# Altium PCB AutoCamera.PcbDoc
Units mm, origin at the board's own origin, x right, y up, seen from the top; angles counter-clockwise.
Board outline 100 x 100 mm, 2 copper layers (Top, Bottom), stack 1.67 mm thick; 14 components, 1 nets, 147 pads, 0 vias.
Unrouted connection lines stored in the file: 1.
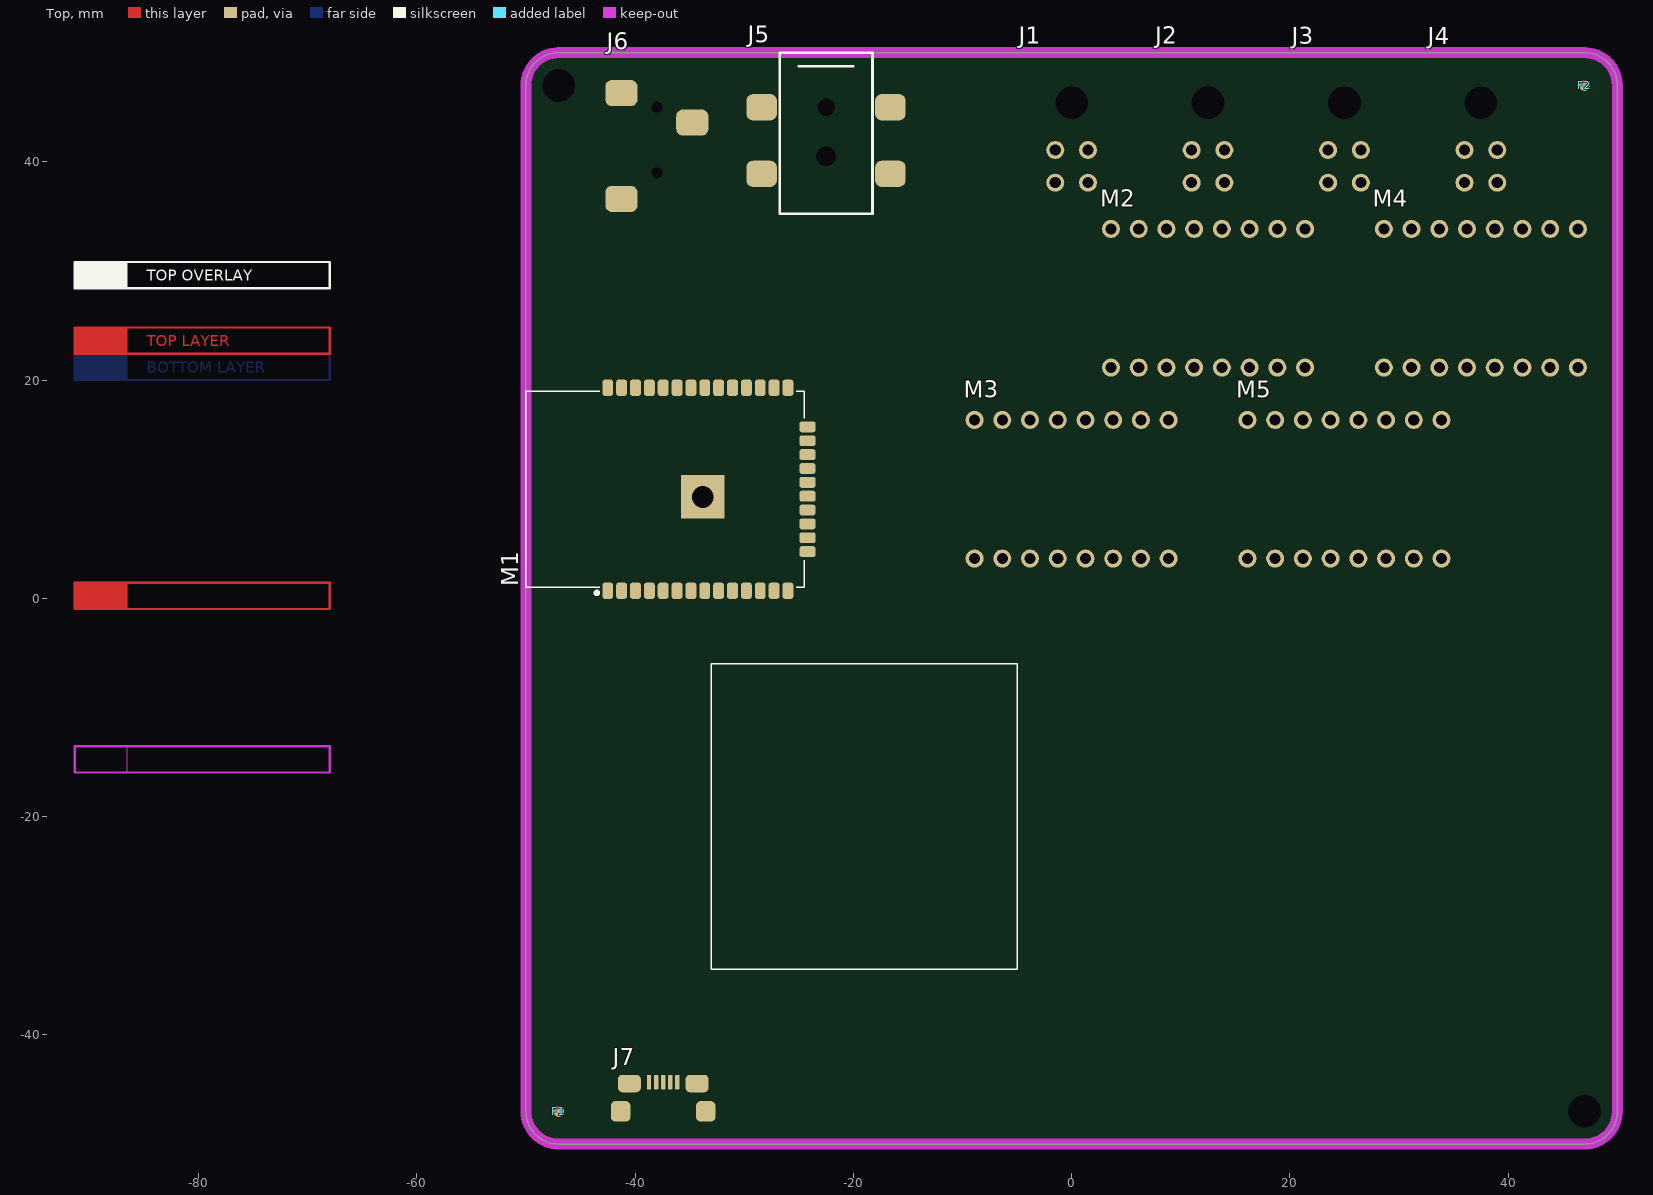
[diagram p0: Top view]
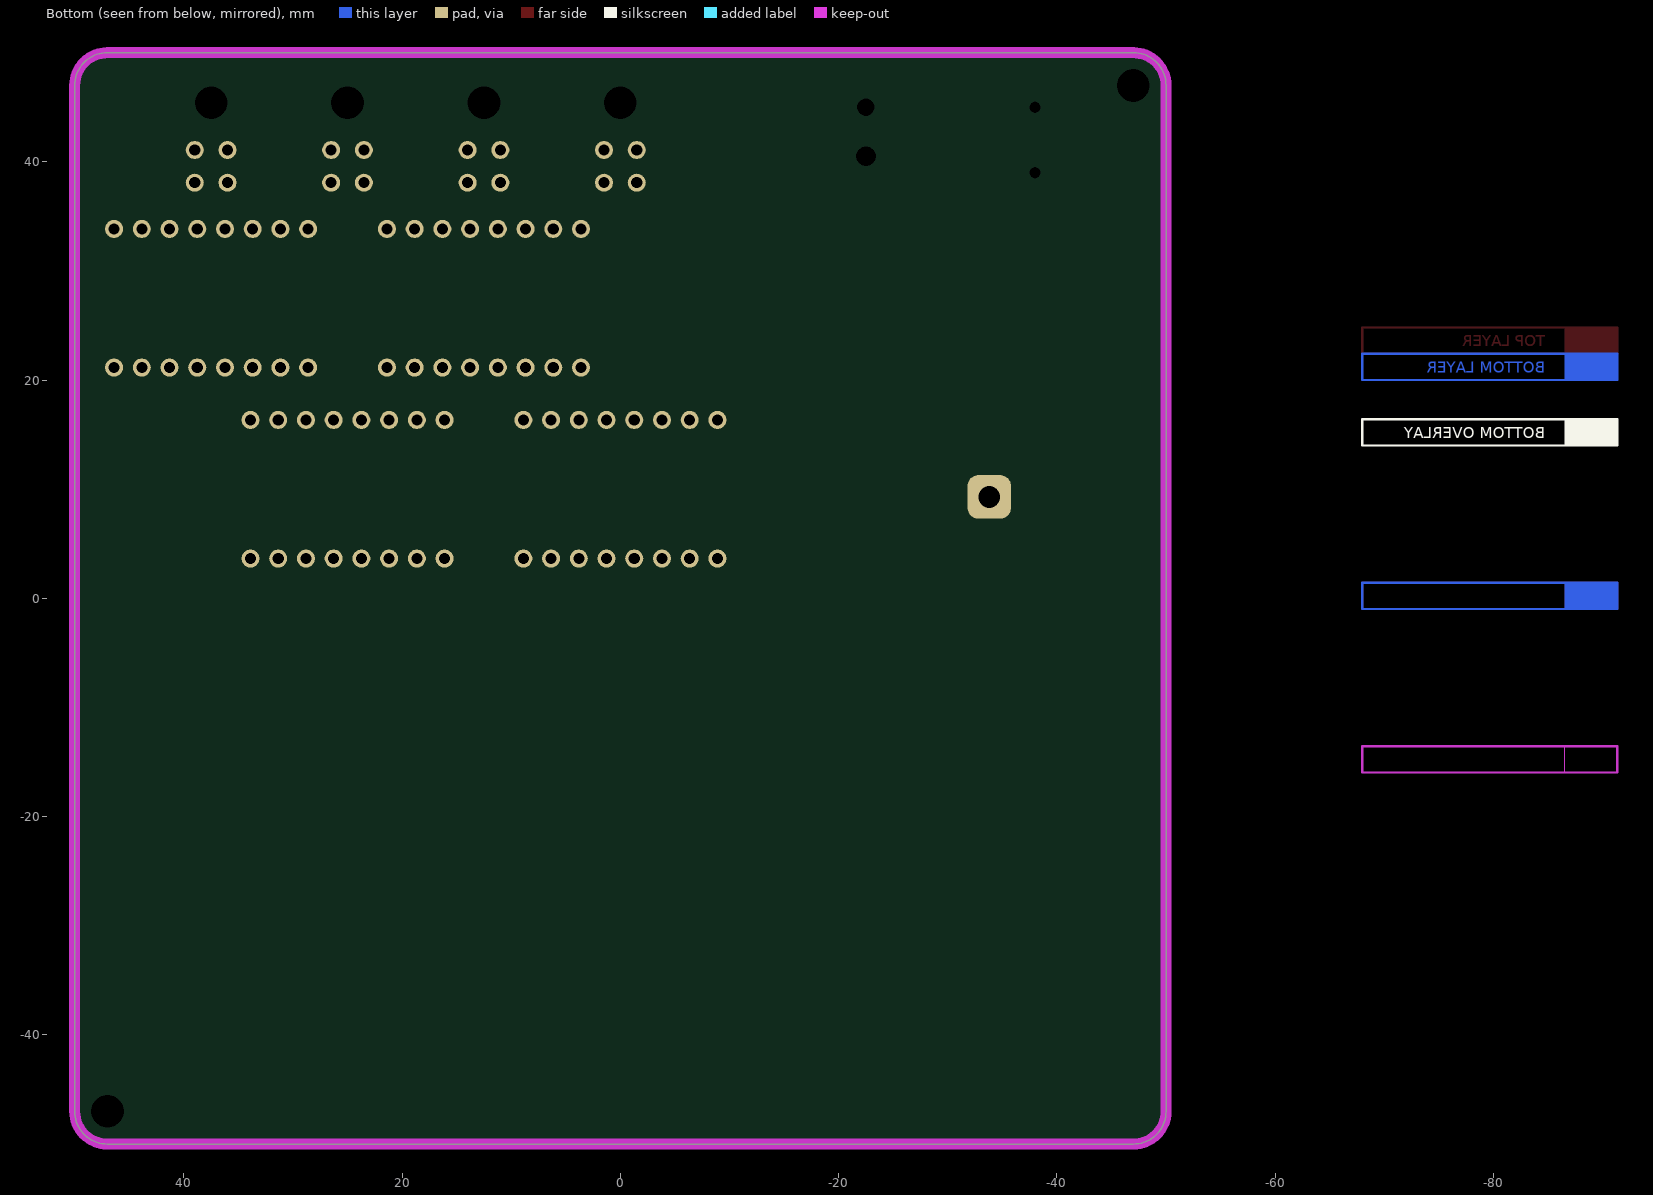
[diagram p1: Bottom view, seen from below]
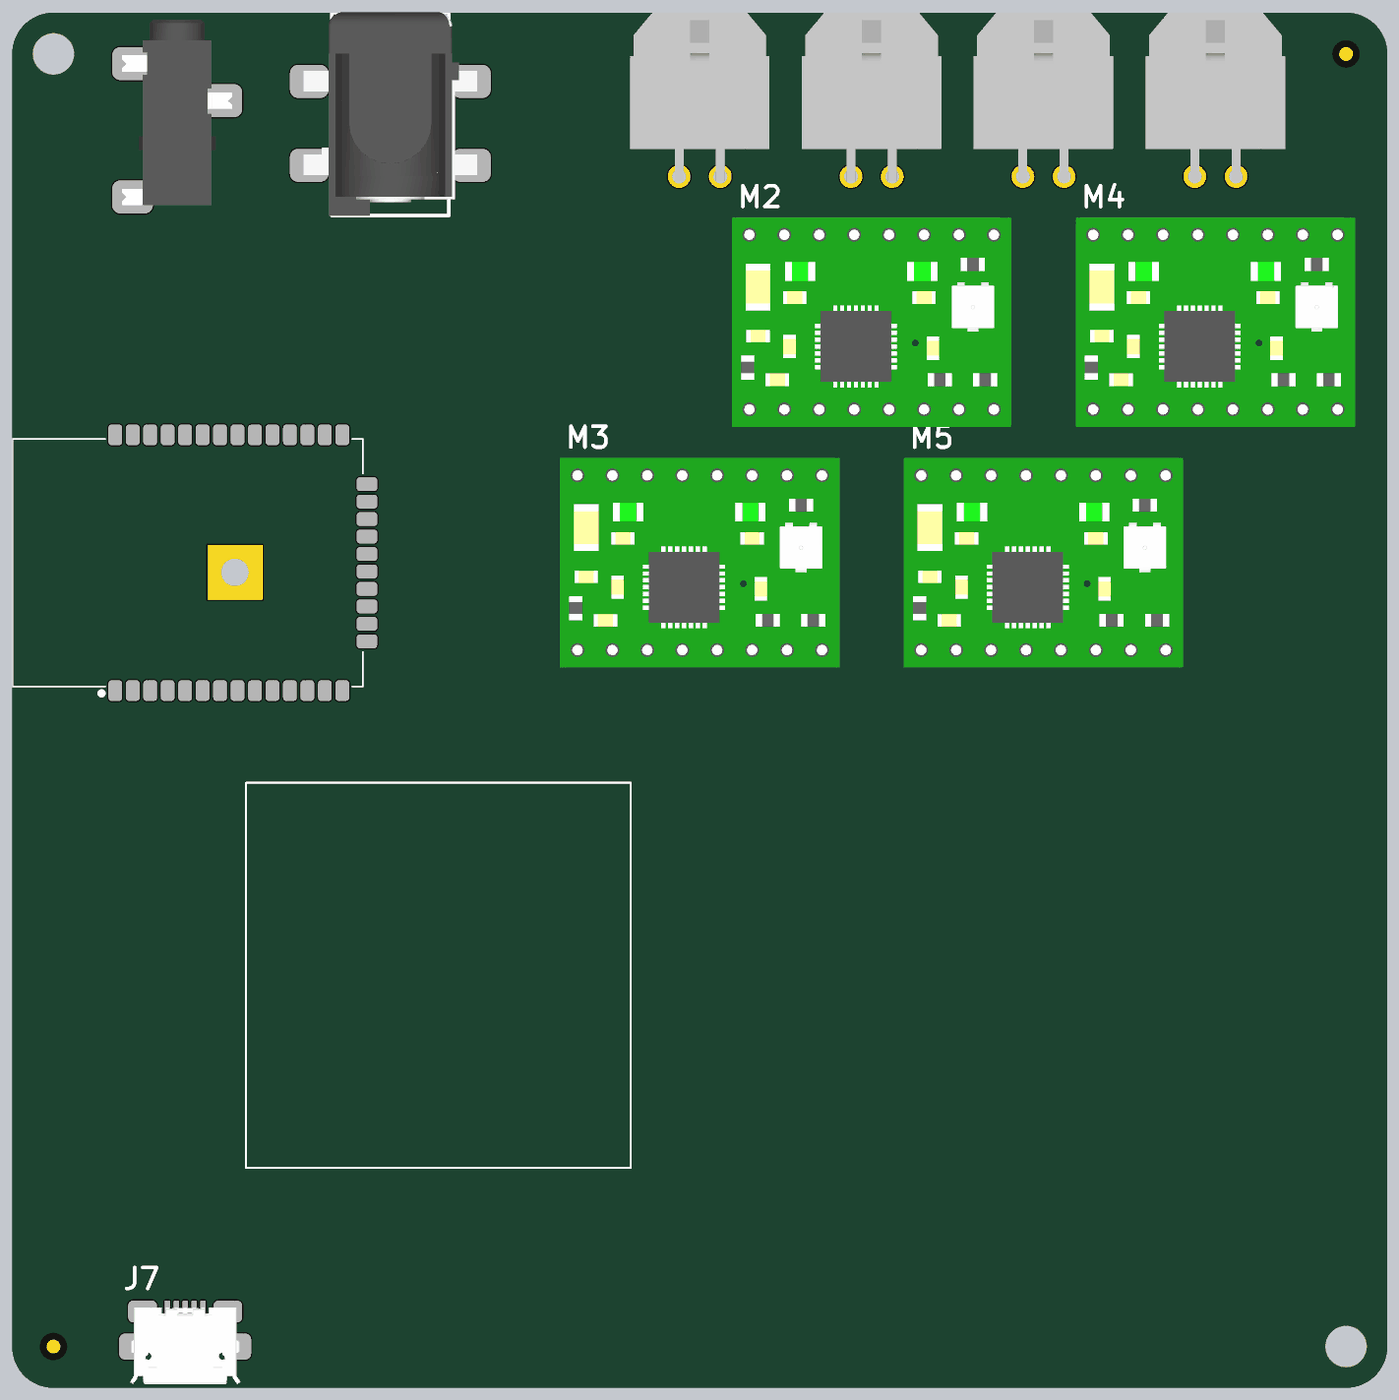
[diagram p2: 3D render of the assembled board from above, using the file's embedded part models]

## Layer stack, top to bottom
Top Solder: solder mask 0.0102, Solder Resist, Dk 3.5
Top: signal copper 0.035
Dielectric1: core 1.6, FR-4, Dk 4.58
Bottom: signal copper 0.035
Bottom Solder: solder mask 0.0102, Solder Resist, Dk 3.5

## Board outline
-50,-47 -50,47 cw(c-47,47) -47,50 47,50 cw(c47,47) 50,47 50,-47 cw(c47,-47) 47,-50 -47,-50 cw(c-47,-47)

## Design rules (kind name [scope] priority, off if disabled: settings)
AssemblyTestPointUsage [All] p1 off:
AssemblyTestpoint [All] p1 off: testpointundercomponent=TRUE minsize=1.016 maxsize=2.54 preferedsize=1.524 minholesize=0 maxholesize=1.016 preferedholesize=0.813 testpointgrid=0.025 usegrid=TRUE gridtolerance=0 allowsidetop=TRUE allowsidebottom=TRUE
Clearance ClearanceViaPad [IsVia vs IsPad] p1: gap=0.1
Clearance ClearanceGNDpolygons [InPolygonClass('GNDpolygons')] p2: gap=0.3
Clearance ClearanceTechnology [All] p3: gap=0.2
FabricationTestPointUsage [All] p1 off: valid=0 allowmultiple=FALSE
FabricationTestpoint [All] p1 off: side=3 testpointundercomponent=TRUE minsize=1.016 maxsize=2.54 preferedsize=1.524 minholesize=0 maxholesize=1.016 preferedholesize=0.813 testpointgrid=0.025 allowsidetop=TRUE allowsidebottom=TRUE usegrid=TRUE gridtolerance=0
HoleSize [All] p1: absolutevalues=TRUE maxlimit=6.3 minlimit=0.3 maxpercent=80.000 minpercent=20.000
HoleToHoleClearance [All] p1: gap=0.3 allowstackedmicrovias=TRUE
MinimumAnnularRing [All] p1: minimumring=0.2
MinimumSolderMaskSliver [All] p1: minsoldermaskwidth=0.1
PlaneClearance [All] p1: clearance=0.25
PolygonConnect PolygonConnectVia [IsVia] p1: connectstyle=Direct reliefconductorwidth=0.4 reliefentries=4 polygonreliefangle="90 Angle" airgapwidth=0.254
PolygonConnect PolygonConnectBigPads [(ObjectKind = 'Pad') And ((AsMM(PadXSize_AllLayers) > 2) Or (AsMM(PadYSize_AllLayers) > 2))] p2: connectstyle=Direct reliefconductorwidth=0.4 reliefentries=4 polygonreliefangle="90 Angle" airgapwidth=0.254
PolygonConnect PolygonConnectGeneral [All] p3: connectstyle=Relief reliefconductorwidth=0.3 reliefentries=4 polygonreliefangle="90 Angle" airgapwidth=0.2
RoutingVias [All] p1: holewidth=0.6 width=1.2 viastyle="Through Hole" minholewidth=0.3 minwidth=0.7 maxholewidth=0.9 maxwidth=1.4
SilkToSilkClearance [All] p1: silktosilkclearance=0.15
SilkToSolderMaskClearance SilkscreenOverComponentPads [IsPad] p1: minsilkscreentomaskgap=0.1 clearancetoexposedcopper=FALSE
SolderMaskExpansion [All] p1: expansion=0.1
Width WidthTechnology [All] p1: maxlimit=3 minlimit=0.16 preferedwidth=0.6
20 further rules are at their usual default settings.

## Classes and differential pairs
component class AutoCamera: J1 J2 J3 J4 J5 J7 M1 M2 M3 M4 M5

## Components (designator, comment, footprint, x,y, rotation, side; value= is the part's Value field where it differs from the comment)
F1 "Fiducial" FIDUCIAL -47,-47 r90 top locked
F2 "Fiducial" FIDUCIAL 47,47 r90 top locked
J1 "43045-0400" MOLEX_43045-0400 0,50 r180 top
J2 "43045-0400" MOLEX_43045-0400 12.5,50 r180 top
J3 "43045-0400" MOLEX_43045-0400 25,50 r180 top
J4 "43045-0400" MOLEX_43045-0400 37.5,50 r180 top
J5 "Barrel Jack, Right Angle" "Barrel Jack, S/M, R/A" -22.5,50 r270 top
J6 "2.5mm Audio Jack" "2.5MM AUDIO" -38,48 r270 top
J7 "USB-MICRO" 10118192 -37.42,-47 r0 top
M1 "ESP-WROOM-32" ESP-WROOM-32 -42.5,10 r90 top
M2 "A4988" A4988 12.5,27.5 r90 top
M3 "A4988" A4988 0,10 r90 top
M4 "A4988" A4988 37.5,27.5 r90 top
M5 "A4988" A4988 25,10 r90 top

## Footprints (in the part's own frame and the unit in brackets; to place one, negate y for a bottom-side part, rotate by r counter-clockwise, add the part's x,y. Pads: shape width x height; smd on the part's side, far side on the other; paste and mask are expansions set on the pad)
"2.5MM AUDIO" [mm]
  rrect50% 2.4x2.95 smd: 1(1.7,-3.25) 2(11.4,-3.25) 3(4.4,3.25)
  round 0 hole 1.016 unplated: 5(3,0)
  round 0 hole 1.016: 6(9,0)
  body extent -1.5,-4 12,4, height 4.6
10118192 [mm] "CONN USB MICRO B RECPT SMT R/A"
  rrect50% 0.4x1.35 smd: 1(-1.3,2.675) 2(-0.65,2.675) 3(0,2.675) 4(0.65,2.675) 5(1.3,2.675)
  rrect50% 1.8x1.9 smd: S1(-3.9,0) S2(3.9,0)
  rrect50% 2.1x1.6 smd: S3(-3.1,2.55) S4(3.1,2.55)
  body extent -4.04,-2.75 4.04,2.85, height 2.78
A4988 [mil] "Stepper Driver"
  round 65 hole 40: 0(-250,350) 1(-250,250) 2(-250,150) 3(-250,50) 4(-250,-50) 5(-250,-150) 6(-250,-250) 7(-250,-350) 8(250,-350) 9(250,-250) 10(250,-150) 11(250,-50) 12(250,50) 13(250,150) 14(250,250) 15(250,350)
  body extent -300,-400 300,400, height 568
"Barrel Jack, S/M, R/A" [mm] "Barrel Jack, 2.5mm ID, 5.5mm OD, Right Angle, Surface Mount"
  rrect50% 2.4x2.8 smd: 1(5,5.9) 1(11.1,5.9) 2(5,-5.9) 3(11.1,-5.9)
  round 0 hole 1.6 unplated: ""(5,0)
  round 0 hole 1.8 unplated: ""(9.5,0)
  silkscreen extent 0,-4.25 14.75,4.25, body extent -0.03,-6.3 14.77,6.3, height 11.1
ESP-WROOM-32 [mm]
  rrect50% 1.5x1 smd: 1(-9.3,0) 2(-9.3,-1.27) 3(-9.3,-2.54) 4(-9.3,-3.81) 5(-9.3,-5.08) 6(-9.3,-6.35) 7(-9.3,-7.62) 8(-9.3,-8.89) 9(-9.3,-10.16) 10(-9.3,-11.43) 11(-9.3,-12.7) 12(-9.3,-13.97) 13(-9.3,-15.24) 14(-9.3,-16.51) 25(9.3,-16.51) 26(9.3,-15.24) 27(9.3,-13.97) 28(9.3,-12.7) 29(9.3,-11.43) 30(9.3,-10.16) 31(9.3,-8.89) 32(9.3,-7.62) 33(9.3,-6.35) 34(9.3,-5.08) 35(9.3,-3.81) 36(9.3,-2.54) 37(9.3,-1.27) 38(9.3,0)
  rrect50% 1x1.5 smd: 15(-5.715,-18.3) 16(-4.445,-18.3) 17(-3.175,-18.3) 18(-1.905,-18.3) 19(-0.635,-18.3) 20(0.635,-18.3) 21(1.905,-18.3) 22(3.175,-18.3) 23(4.445,-18.3) 24(5.715,-18.3)
  rect 4x4 / inner rrect50% 4x4 / far side rrect50% 4x4 hole 2: 39(-0.7,-8.7)
  silkscreen extent -9.55,-18 9,7.5
FIDUCIAL [mm] "Fiducial"
  round 1 smd paste-1 mask+0.5: ""(0,0)
  body extent -0.49,-0.5 0.5,0.5, height 0.5
MOLEX_43045-0400 [mil] "4 Positions Header Connector 0.118\" (3.00mm) Through Hole, Right Angle Tin"
  round 65 hole 40: 1(59,351) 2(-59,351) 3(59,469) 4(-59,469)
  round 0 hole 118: 5(0,181)
  body extent -200,0 200,482, height 345

## Part data
J1 J2 J3 J4: library part "MOLEX 43045-0400", "Molex Micro-fit, 4-Position, Right Angle, Through Hole"
J5: "Barrel Jack, 2.5mm ID, 5.5mm OD, Right Angle, Surface Mount"

## Free pads (board coordinates)
  round 1 hole 3: 0(-47,47) 0(47,-47)

## Nets (pads, with @x,y where several pads share a name; then routed paths per layer and width w, separated by ;. In a path a pad name is that pad's centre, name@x,y a point inside that pad or via, vN(x,y) a via of type N, cw(c..) or ccw(c..) an arc to the next point about the centre after c; other vN are vias at no path point)
GND: M1.38 M1.39
pads on no net: F1. F2. J1.1 J1.2 J1.3 J1.4 J1.5 J2.1 J2.2 J2.3 J2.4 J2.5 J3.1 J3.2 J3.3 J3.4 J3.5 J4.1 J4.2 J4.3 J4.4 J4.5 J5. J5.1 J5.2 J5.3 J6.1 J6.2 J6.3 J6.5 J6.6 J7.1 J7.2 J7.3 J7.4 J7.5 J7.S1 J7.S2 J7.S3 J7.S4 M1.1 M1.2 M1.3 M1.4 M1.5 M1.6 M1.7 M1.8 M1.9 M1.10 M1.11 M1.12 M1.13 M1.14 M1.15 M1.16 M1.17 M1.18 M1.19 M1.20 M1.21 M1.22 M1.23 M1.24 M1.25 M1.26 M1.27 M1.28 M1.29 M1.30 M1.31 M1.32 M1.33 M1.34 M1.35 M1.36 M1.37 M2.0 M2.1 M2.2 M2.3 M2.4 M2.5 M2.6 M2.7 M2.8 M2.9 M2.10 M2.11 M2.12 M2.13 M2.14 M2.15 M3.0 M3.1 M3.2 M3.3 M3.4 M3.5 M3.6 M3.7 M3.8 M3.9 M3.10 M3.11 M3.12 M3.13 M3.14 M3.15 M4.0 M4.1 M4.2 M4.3 M4.4 M4.5 M4.6 M4.7 M4.8 M4.9 M4.10 M4.11 M4.12 M4.13 M4.14 M4.15 M5.0 M5.1 M5.2 M5.3 M5.4 M5.5 M5.6 M5.7 M5.8 M5.9 M5.10 M5.11 M5.12 M5.13 M5.14 M5.15
copper on no net: | length 103.1
  Top w0.2: -91.342,22.414 -91.342,24.827 -67.974,24.827 -67.974,22.414 -91.342,22.414
  Bottom w0.2: -91.342,20.001 -91.342,22.414 -67.974,22.414 -67.974,20.001 -91.342,20.001

## Polygon pours and split planes (outlines as drawn)
GND on Bottom "Top-No Net" (solid, remove dead copper, shelved, pour order 0): -50,-47 -50,47 cw(c-47,47) -47,50 47,50 cw(c47,47) 50,47 50,-47 cw(c47,-47) 47,-50 -47,-50 cw(c-47,-47)

## Keep-outs
Keep-Out Layer:
  rectangle: -91.342,-15.965 -86.516,-13.552
  lines w0.2: -91.342,-15.965 -91.342,-13.552 -67.974,-13.552 -67.974,-15.965 -91.342,-15.965
  lines w1: -47,50 ccw(c-47,47) -50,47 -50,-47 ccw(c-47,-47) -47,-50 47,-50 ccw(c47,-47) 50,-47 ; -47,50 -47,50 ; -47,50 47,50 ; 47,50 cw(c47,47) 50,47 ; 47,50 47,50 ; 50,-47 50,47 ; 50,-47 50,-47 ; 50,47 50,47
  text "ROUTING KEEPOUT LAYER" at -84.738,-15.279 h0.89

## Other copper
Top:
  rectangle: -91.342,22.414 -86.516,24.827
  text "TOP LAYER" at -84.738,23.1 h1.02
Bottom:
  rectangle: -91.342,20.001 -86.516,22.414
  text "BOTTOM LAYER" at -84.738,20.687 h1.02
Multi-Layer:
  rectangle: -91.342,-0.979 -86.516,1.434
  lines w0.2: -91.342,-0.979 -91.342,1.434 -67.974,1.434 -67.974,-0.979 -91.342,-0.979
  text "MULTILAYER" at -84.738,-0.293 h1.02

## Silkscreen, mask and mechanical layers (free items; w line width, h text height)
Top Overlay:
  rectangle: -91.342,28.409 -86.516,30.822
  lines w0.127: -33,-34 -5,-34 -5,-6 -33,-6 -33,-34
  lines w0.2: -91.342,28.409 -67.974,28.409 -67.974,30.822 -91.342,30.822 -91.342,28.409
  text "TOP OVERLAY" at -84.738,29.094 h1.02
Bottom Overlay:
  rectangle: -91.342,14.007 -86.516,16.42
  lines w0.2: -91.342,14.007 -67.974,14.007 -67.974,16.42 -91.342,16.42 -91.342,14.007
  text "BOTTOM OVERLAY" at -84.738,14.693 h1.02
Top Paste:
  rectangle: -91.342,31.406 -86.516,33.819
  lines w0.2: -91.342,31.406 -91.342,33.819 -67.974,33.819 -67.974,31.406 -91.342,31.406
  text "TOP PASTE" at -84.738,32.092 h1.02
Bottom Paste:
  rectangle: -91.342,11.01 -86.516,13.423
  lines w0.2: -91.342,11.01 -91.342,13.423 -67.974,13.423 -67.974,11.01 -91.342,11.01
  text "BOTTOM PASTE" at -84.738,11.695 h1.02
Top Solder:
  rectangle: -91.342,25.411 -86.516,27.824
  lines w0.2: -91.342,25.411 -67.974,25.411 -67.974,27.824 -91.342,27.824 -91.342,25.411
  text "TOP SOLDER MASK" at -84.738,26.097 h1.02
Bottom Solder:
  rectangle: -91.342,17.004 -86.516,19.417
  lines w0.2: -91.342,17.004 -91.342,19.417 -67.974,19.417 -67.974,17.004 -91.342,17.004
  text "BOTTOM SOLDER MASK" at -84.738,17.69 h1.02
Drill Guide:
  rectangle: -91.342,8.012 -86.516,10.425
  lines w0.2: -91.342,8.012 -67.974,8.012 -67.974,10.425 -91.342,10.425 -91.342,8.012
  text "DRILL GUIDE (SLOTS)" at -84.738,8.698 h1.02
Outline:
  rectangle: -91.342,2.018 -86.516,4.431
  lines w0.1: -50,-47 ccw(c-47,-47) -47,-50 47,-50 ccw(c47,-47) 50,-47 50,47 ccw(c47,47) 47,50 -47,50 ccw(c-47,47) -50,47 -50,-47
  lines w0.2: -91.342,2.018 -67.974,2.018 -67.974,4.431 -91.342,4.431 -91.342,2.018
  lines w0.25: 69.824,-78.075 198.576,-78.075 ; 69.824,-73.725 198.576,-73.725 ; 68.3,-98 ccw(c69.7,-98) 69.7,-99.4 198.7,-99.4 ccw(c198.7,-98) 200.1,-98 200.1,-69 ccw(c198.7,-69) 198.7,-67.6 69.7,-67.6 ccw(c69.7,-69) 68.3,-69 68.3,-98
  lines w0.254: -93.882,67.702 19,67.702 19,62 ; -93.882,72.827 19,72.827 19,67.136 ; -89.056,36.105 -69.498,36.105 ; -17,62 -17,67.702 ; 19,72.825 44.975,72.825 ; -93.882,-18.175 -93.882,41.693 -65.18,41.693 -65.18,-18.175 -93.882,-18.175 ; -93.882,62 45,62 45,80.05 -93.882,80.05 -93.882,62
  text ".GlobalProjectName" at -82.125,74.975 h3
  text "Project:" at -92.406,74.816 h1.2
  text ".GlobalProjectTeam" at -84.65,69.3 h2.03
  text ".GlobalProjectLink" at -14.85,69.3 h2.03
  text "Team:" at -92.406,69.225 h1.2
  text "More info:" at -24.65,69.225 h1.2
  text ".GlobalProjectRevision" at 25,64 h7
  text ".Pcb_File_Name_No_Path" at -78,63.934 h2.03
  text "PCB file name:" at -92.406,63.907 h1.2
  text ".GlobalRevisionDate" at -1.881,63.507 h2.03
  text "Rev:" at 21,63.507 h1.2
  text "Revision date:" at -15.056,63.407 h1.2
  text "LAYER USAGE" at -89.056,36.816 h2.03
  text "Fusion service size limits" at 81,26.8 h5
  text "5cm X 5cm" at 84,21.802 h5
  text "5cm X 10cm" at 84,18.024 h5
  text "5cm X 15cm" at 84,14.246 h5
  text "5cm X 20cm" at 84,10.468 h5
  text "10cm X 10cm" at 84,6.69 h5
  text "10cm X 15cm" at 84,2.912 h5
  text "BOARD OUTLINE" at -84.738,2.704 h1.02
  text "10cm X 20cm" at 84,-0.866 h5
  text "15cm X 15cm" at 84,-4.644 h5
  text "15cm X 20cm" at 84,-8.422 h5
  text "20cm X 20cm" at 84,-12.2 h5
  text "Layer Stack Up Detail for: 2 Layer Seed Fusion template" at 69.824,-72.178 h2.05
  text "Layer" at 69.824,-75.35 h1
  text "Gerber" at 97.375,-75.35 h1
  text "Copper" at 111.317,-75.35 h1
  text "Dielectric" at 126.892,-75.35 h1
  text "Dielectric" at 143.166,-75.35 h1
  text "Dielectric" at 163.72,-75.35 h1
  text "Dielectric" at 179.994,-75.35 h1
  text "Name" at 69.824,-77.35 h1
  text "Document" at 97.375,-77.35 h1
  text "Thickness" at 111.317,-77.35 h1
  text "Height" at 126.892,-77.35 h1
  text "Material" at 143.166,-77.35 h1
  text "Constant" at 163.72,-77.35 h1
  text "Type" at 179.994,-77.35 h1
  text "Top Solder Mask" at 69.824,-81.222 h1.4
  text "(.GTS)" at 97.375,-81.222 h1.4
  text "0.0102mm" at 126.892,-81.222 h1.4
  text "Solder Resist" at 143.166,-81.222 h1.4
  text "3.50" at 163.72,-81.222 h1.4
  text "Top" at 69.824,-85.252 h1.4
  text "(.GTL)" at 97.375,-85.252 h1.4
  text "0.035mm" at 111.317,-85.252 h1.4
  text "1.6mm" at 126.892,-87.267 h1.4
  text "FR-4" at 143.166,-87.267 h1.4
  text "4.58" at 163.72,-87.267 h1.4
  text "Core" at 179.994,-87.267 h1.4
  text "Bottom" at 69.824,-89.282 h1.4
  text "(.GBL)" at 97.375,-89.282 h1.4
  text "0.035mm" at 111.317,-89.282 h1.4
  text "Bottom Solder Mask" at 69.824,-93.312 h1.4
  text "(.GBS)" at 97.375,-93.312 h1.4
  text "0.0102mm" at 126.892,-93.312 h1.4
  text "Solder Resist" at 143.166,-93.312 h1.4
  text "3.50" at 163.72,-93.312 h1.4
Dimensions:
  rectangle: -91.342,-12.968 -86.516,-10.555
  lines w0.2: -91.146,-60.834 -73.061,-60.834 ; -91.07,-52.782 -72.985,-52.782 ; -91.07,-33.631 -72.985,-33.631 ; -91.045,-41.327 -72.96,-41.327 ; -90.918,-30.202 -72.833,-30.202 ; -91.342,-12.968 -67.974,-12.968 -67.974,-10.555 -91.342,-10.555 -91.342,-12.968
  lines w0.254: -92.064,-67.8 -92.064,-26.417 -67.908,-26.417 -67.908,-67.8 -92.064,-67.8
  text "DIMENSIONS" at -84.738,-12.282 h1.02
  text "BUILD STATISTICS" at -90.816,-29.414 h1.52
  text "GENERAL" at -91.019,-33.123 h1.02
  text ".Net_Count" at -81.342,-35.231 h1.02
  text "NETS" at -90.943,-35.282 h0.89
  text ".Component_Count" at -81.342,-37.314 h1.02
  text "COMPONENTS" at -90.918,-37.339 h0.89
  text "PRIMITIVES" at -90.994,-40.819 h1.02
  text ".Fill_Count" at -81.342,-42.952 h1.02
  text "FILLS" at -90.918,-42.978 h0.89
  text ".Track_Count" at -81.342,-45.01 h1.02
  text "TRACKS" at -90.918,-45.061 h0.89
  text ".String_Count" at -81.342,-47.093 h1.02
  text "STRINGS" at -90.918,-47.143 h0.89
  text ".Arc_Count" at -81.342,-49.201 h1.02
  text "ARC'S" at -90.918,-49.252 h0.89
  text "LANDS" at -91.019,-52.274 h1.02
  text ".Pad_Count" at -81.342,-54.408 h1.02
  text ".Pad_Count" at -81.342,-54.408 h1.02
  text "PADS" at -90.918,-54.459 h0.89
  text ".Via_Count" at -81.342,-56.491 h1.02
  text "VIA'S" at -90.892,-56.516 h0.89
  text "PRINT SCALE" at -91.095,-60.326 h1.02
  text ".Print_Scale" at -81.393,-62.485 h1.02
  text "SCALE" at -90.968,-62.51 h0.89
  text ".Print_Date" at -81.393,-64.542 h1.02
  text "PRINT DATE" at -90.943,-64.568 h0.89
  text ".Print_Time" at -81.367,-66.6 h1.02
  text "PRINT TIME" at -90.918,-66.625 h0.89
Assembly Top:
  rectangle: -91.342,-3.976 -86.516,-1.563
  lines w0.2: -91.342,-3.976 -91.342,-1.563 -67.974,-1.563 -67.974,-3.976 -91.342,-3.976
  text "TOP ASSEMBLY" at -84.738,-3.291 h1.02
Assembly Bot:
  rectangle: -91.342,-6.974 -86.516,-4.561
  lines w0.2: -91.342,-6.974 -91.342,-4.561 -67.974,-4.561 -67.974,-6.974 -91.342,-6.974
  text "BOTTOM ASSEMBLY" at -84.738,-6.288 h1.02
Drill Drawing:
  circle w0.254: c-49.494,-81.399 r0.847
  rectangle: -91.342,5.015 -86.516,7.428
  lines w0.2: -91.342,5.015 -91.342,7.428 -67.974,7.428 -67.974,5.015 -91.342,5.015
  lines w0.254: -50.34,-91.982 -48.647,-91.982 -49.494,-93.675 -50.34,-91.982 ; -50.34,-89.442 -49.917,-89.442 -49.494,-89.865 -49.07,-89.442 -48.647,-89.442 -49.07,-89.019 -48.647,-88.595 -49.07,-88.595 -49.494,-88.172 -49.917,-88.595 -50.34,-88.595 -49.917,-89.019 -50.34,-89.442 ; -50.34,-85.209 -49.494,-86.055 -48.647,-85.209 -49.494,-84.362 -50.34,-85.209 ; -50.34,-78.012 -49.917,-78.012 -49.917,-78.435 -49.07,-78.435 -49.07,-78.012 -48.647,-78.012 -48.647,-77.165 -49.07,-77.165 -49.07,-76.742 -49.917,-76.742 -49.917,-77.165 -50.34,-77.165 -50.34,-78.012 ; -50.34,-74.625 -49.494,-74.202 -48.647,-74.625 -49.07,-73.779 -48.647,-72.932 -49.494,-73.355 -50.34,-72.932 -49.917,-73.779 -50.34,-74.625 ; -50.34,-70.815 -50.34,-70.392 -49.917,-69.969 -50.34,-69.545 -50.34,-69.122 -49.917,-69.122 -49.494,-69.545 -49.07,-69.122 -48.647,-69.122 -48.647,-69.545 -49.07,-69.969 -48.647,-70.392 -48.647,-70.815 -49.07,-70.815 -49.494,-70.392 -49.917,-70.815 -50.34,-70.815
  lines w0.381: -51.859,-94.818 46.667,-94.818 ; -51.859,-68.148 46.667,-68.148 ; -37.867,-98.628 -37.867,-64.338 ; -20.142,-98.628 -20.142,-64.338 ; 14.036,-98.628 14.036,-64.338 ; 26.885,-98.628 26.885,-64.338 ; -51.859,-98.628 46.667,-98.628 46.667,-64.338 -51.859,-64.338 -51.859,-98.628
  text "DRILL DRAWING" at -84.738,5.701 h1.02
  text "Symbol" at -49.573,-67.005 h1.83
  text "Hit Count" at -36.724,-67.005 h1.83
  text "Finished Hole Size" at -18.999,-67.005 h1.83
  text "Plated" at 15.179,-67.005 h1.83
  text "Hole Type" at 28.028,-67.005 h1.83
  text "1" at -36.724,-70.815 h1.52
  text "1.0mm" at -18.999,-70.815 h1.52
  text "NPTH" at 15.179,-70.815 h1.52
  text "Round" at 28.028,-70.815 h1.52
  text "1" at -36.724,-74.625 h1.52
  text "1.6mm" at -18.999,-74.625 h1.52
  text "NPTH" at 15.179,-74.625 h1.52
  text "Round" at 28.028,-74.625 h1.52
  text "1" at -36.724,-78.435 h1.52
  text "1.8mm" at -18.999,-78.435 h1.52
  text "NPTH" at 15.179,-78.435 h1.52
  text "Round" at 28.028,-78.435 h1.52
  text "1" at -36.724,-82.245 h1.52
  text "2.0mm" at -18.999,-82.245 h1.52
  text "PTH" at 15.179,-82.245 h1.52
  text "Round" at 28.028,-82.245 h1.52
  text "2" at -36.724,-86.055 h1.52
  text "3.0mm" at -18.999,-86.055 h1.52
  text "PTH" at 15.179,-86.055 h1.52
  text "Round" at 28.028,-86.055 h1.52
  text "4" at -36.724,-89.865 h1.52
  text "3.0mm" at -18.999,-89.865 h1.52
  text "PTH" at 15.179,-89.865 h1.52
  text "Round" at 28.028,-89.865 h1.52
  text "81" at -36.724,-93.675 h1.52
  text "1.0mm" at -18.999,-93.675 h1.52
  text "PTH" at 15.179,-93.675 h1.52
  text "Round" at 28.028,-93.675 h1.52
  text "91 Total" at -36.724,-97.485 h1.52

## Dimensions
47,-50 to 47,50 on Dimensions
-50,-47 to 50,-47 on Dimensions

## Text inside footprints (layer, text, board x,y; h text height)
M1: Outline "Board Cutout" at -49,1.3 h0.76 r90